# Altium PCB PCB1.PcbDoc
Units mil, origin at the board's own origin, x right, y up, seen from the top; angles counter-clockwise.
Board outline 3345 x 2755 mil, 2 copper layers (Top Layer, Bottom Layer); 16 components, 30 nets, 135 pads, 25 vias.
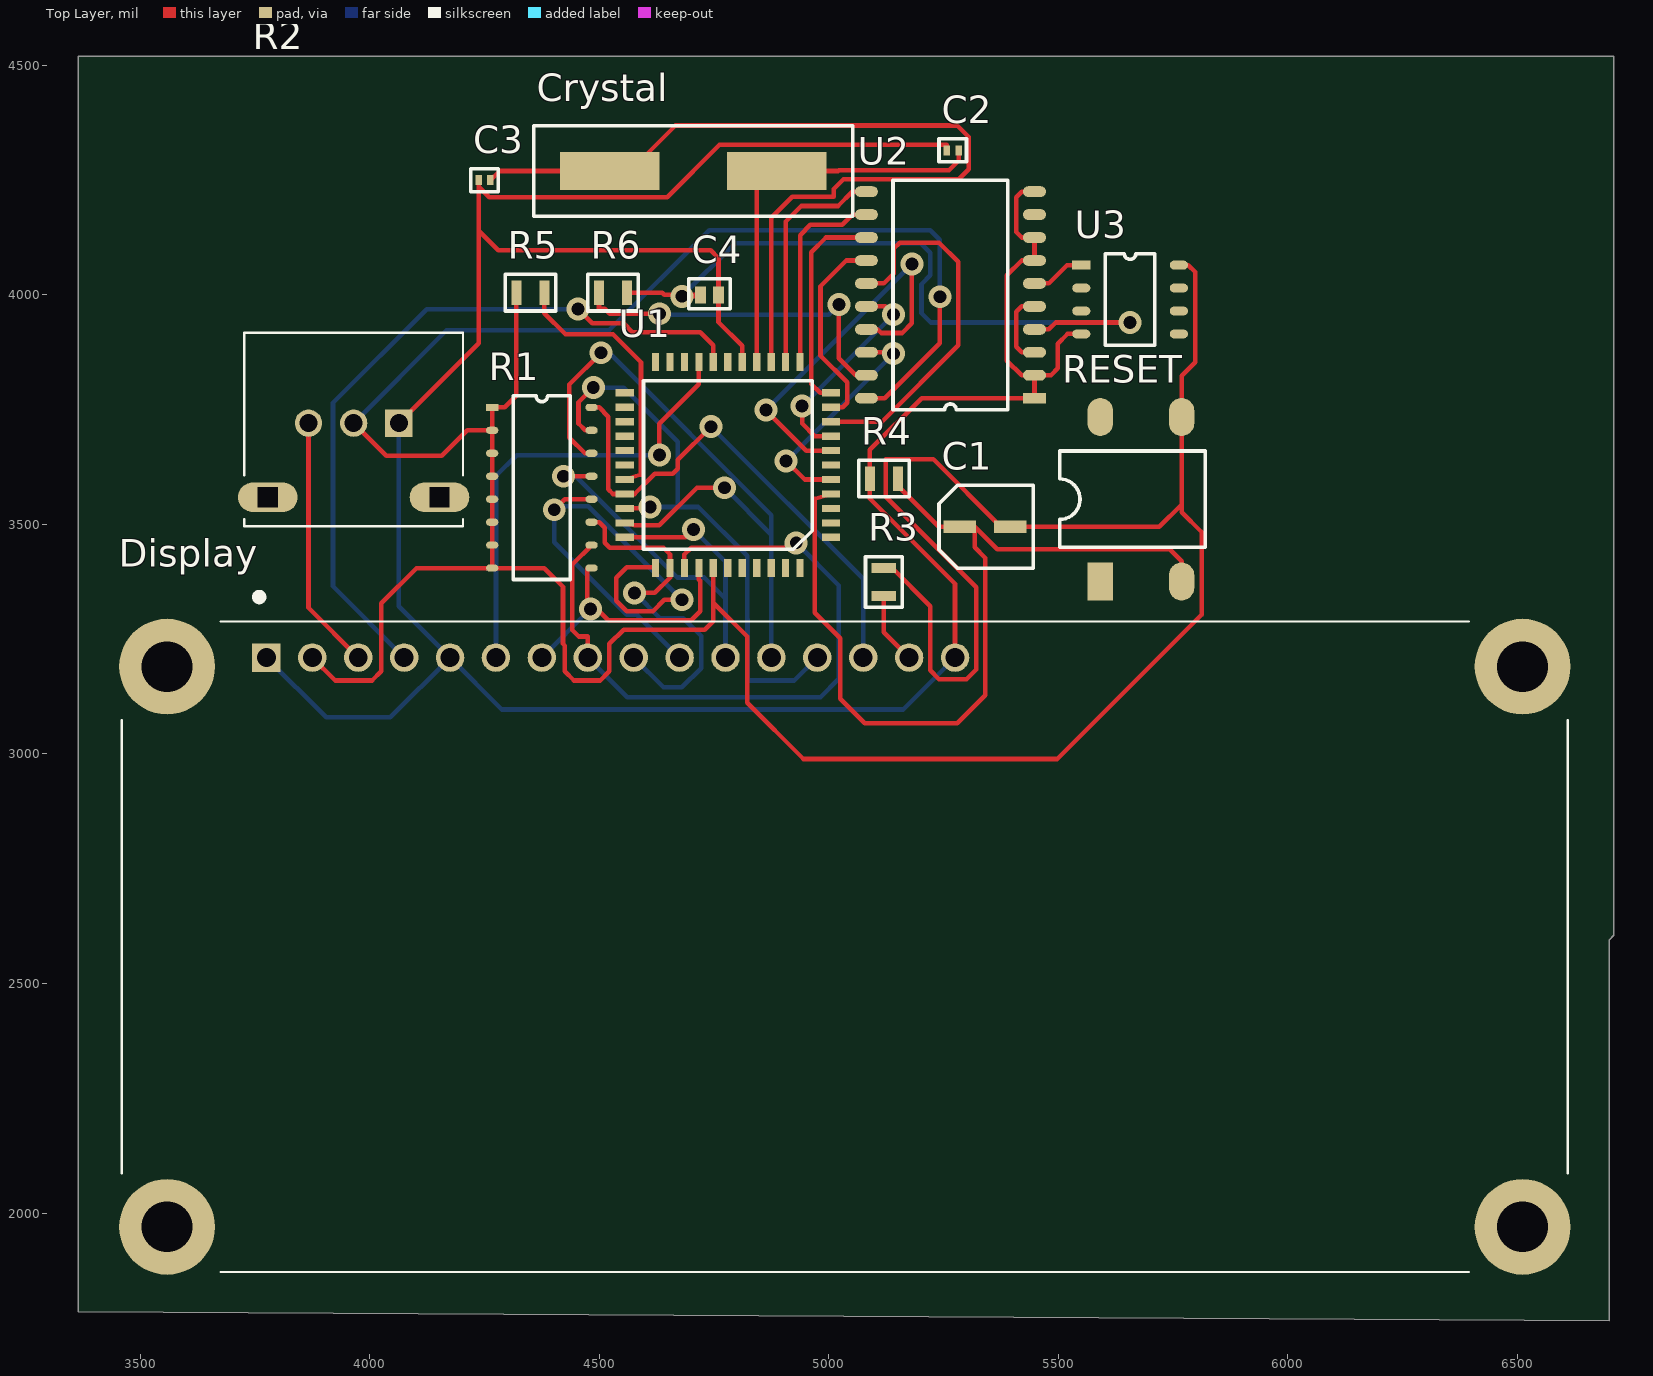
[diagram p0: Top Layer view]
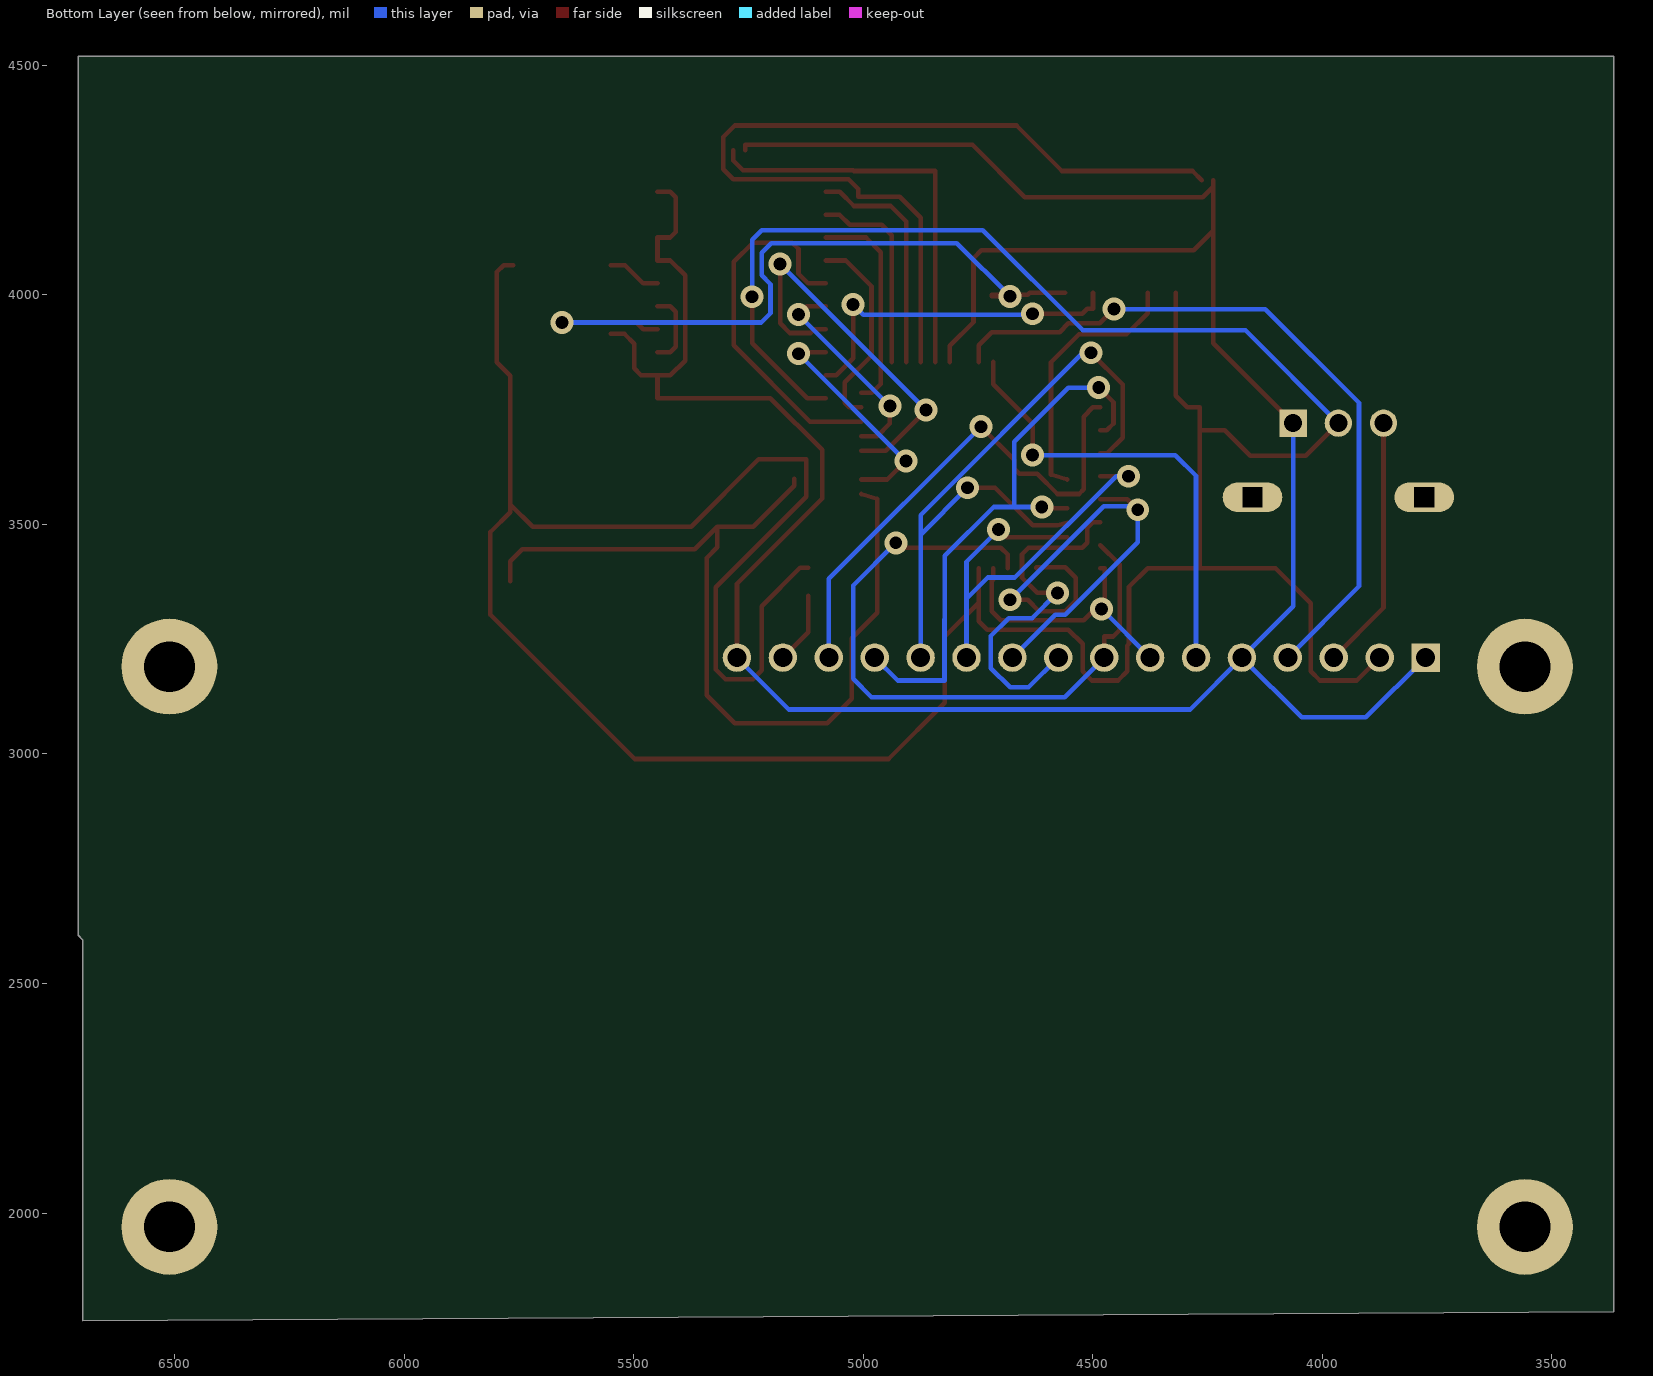
[diagram p1: Bottom Layer view, seen from below]
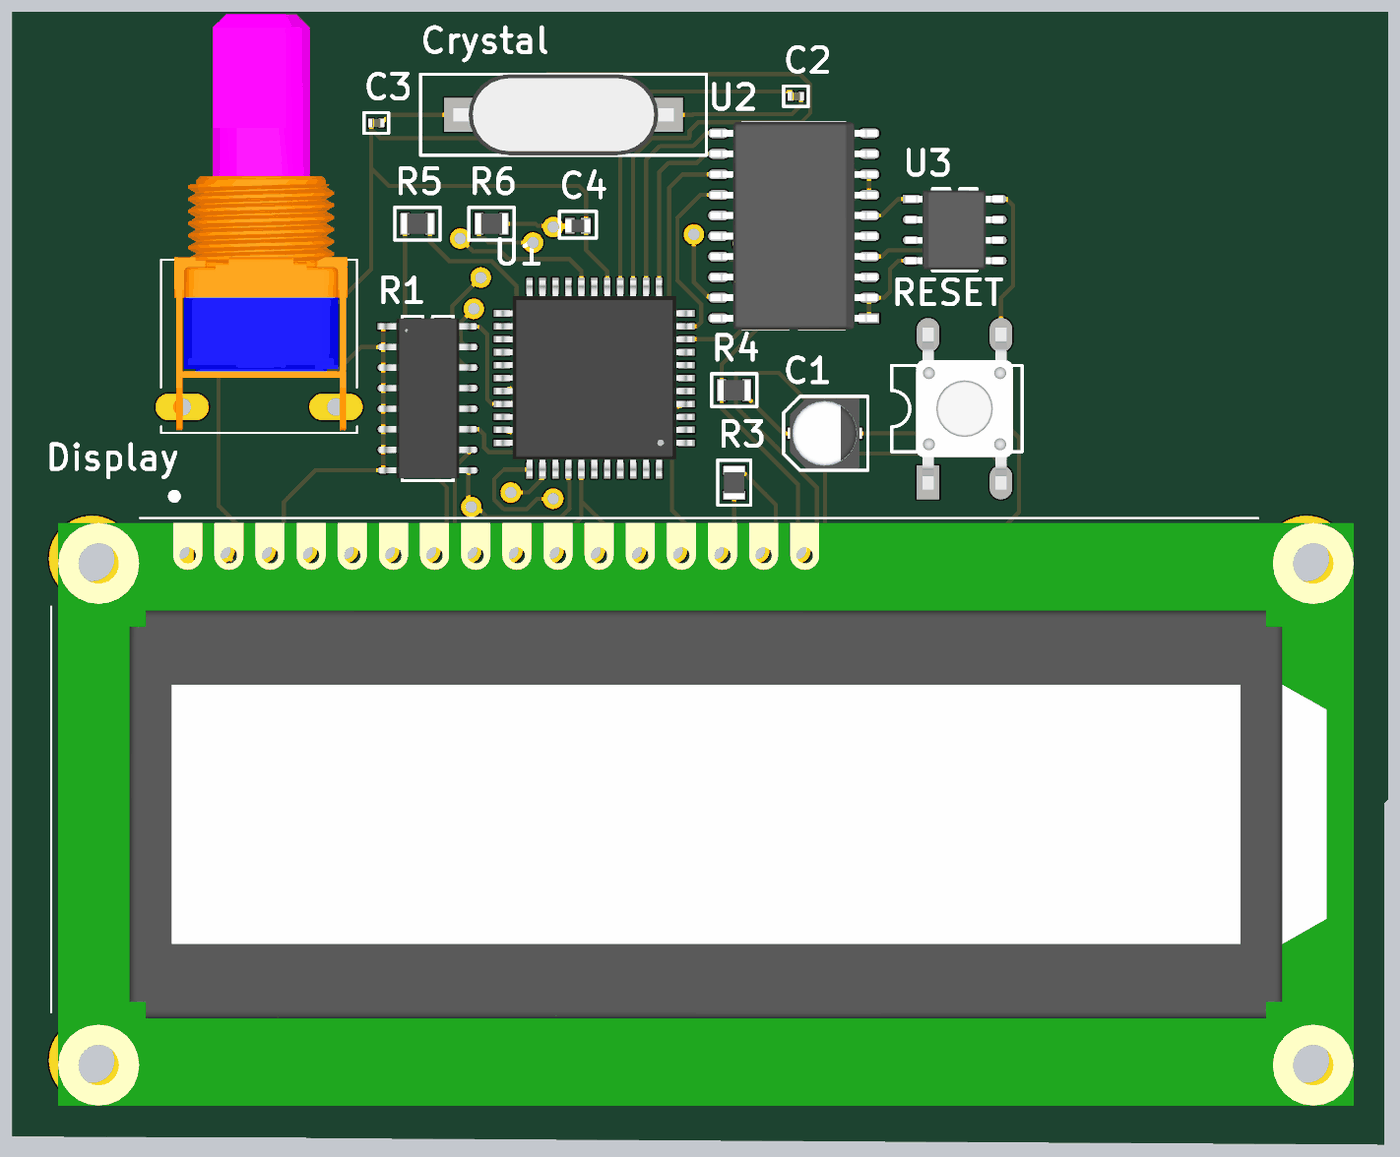
[diagram p2: 3D render of the assembled board from above, using the file's embedded part models]

## Layer stack, top to bottom
Top Solder: solder mask 0.4, Solder Resist, Dk 3.5
Top Layer: signal copper 1.4
Dielectric 1: dielectric 12.6, FR-4, Dk 4.8
Bottom Layer: signal copper 1.4
Bottom Solder: solder mask 0.4, Solder Resist, Dk 3.5

## Board outline
3365,1785 3365,4520 6710,4520 6710,2605 6700,2595 6700,2210 6700,1765

## Design rules (kind name [scope] priority, off if disabled: settings)
Clearance [All] p1: gap=10 ignorepadtopadclearanceinfootprint=FALSE except(0: Arc-Hole Track-Hole SMDPad-Hole THPad-Hole Via-Hole Fill-Hole Poly-Hole Region-Hole Text-Hole)
PolygonConnect [All] p1: connectstyle=Relief reliefconductorwidth=10 reliefentries=4 polygonreliefangle="90 Angle" airgapwidth=10
RoutingVias [All] p1: holewidth=28 width=50 viastyle="Through Hole" minholewidth=28 minwidth=50 maxholewidth=28 maxwidth=50
SolderMaskExpansion [All] p1: expansion=4 istentingtop=FALSE
Width [All] p1: maxlimit=10 minlimit=10 preferedwidth=10
30 further rules are at their usual default settings.

## Components (designator, comment, footprint, x,y, rotation, side; value= is the part's Value field where it differs from the comment)
C1 "10μF/16V Capacitor" "10µf/16v Capacitor" 5340,3495 r180 top
C2 "33pF capacitor" "33pF Capacitor" 5270,4315 r0 top
C3 "33pF capacitor" "33pF Capacitor" 4250,4250 r0 top
C4 "150pF Capacitor" "150pF Capacitor" 4740,4000 r0 top
Crystal "FC4SDCBMF11.0592-T1" "Crystal 11.0592MHz" 4705,4270 r0 top
Display "16X2 LCD Display" "16X2 LCD Display" 5056.5,2568.27 r0 top
R1 "1KΩ x 8 Resistor Pack" "1KO x 8 Resistor Pack" 4375,3580 r0 top
R2 "10k pot" "10k pot" 4000,4000 r90 top
R3 "330 Ohm resistor" "330O Resistor" 5120,3375 r90 top
R4 "10K Resistor" "10KO Resistor" 5120,3600 r0 top
R5 "10K Resistor" "10KO Resistor" 4350,4005 r0 top
R6 "10K Resistor" "10KO Resistor" 4530,4005 r0 top
RESET "TL3305AF260QG" Reset 5680,3555 r90 top
U1 "AT89C51RB2-SLSUM" "AT89C51 (8051 Microcontroller)" 4780,3629.41 r180 top
U2 "ADC0804" ADC0804 5265,4000 r180 top
U3 "LM35DMX/NOPB" LM35DMX 5550,4065 r0 top

## Footprints (in the part's own frame and the unit in brackets; to place one, negate y for a bottom-side part, rotate by r counter-clockwise, add the part's x,y. Pads: shape width x height; smd on the part's side, far side on the other; paste and mask are expansions set on the pad)
"1KO x 8 Resistor Pack" [mm]
  rect 0.68x0.4 smd: 1(-2.75,4.445)
  oval 0.68x0.4 smd: 2(-2.75,3.175) 3(-2.75,1.905) 4(-2.75,0.635) 5(-2.75,-0.635) 6(-2.75,-1.905) 7(-2.75,-3.175) 8(-2.75,-4.445) 9(2.75,-4.445) 10(2.75,-3.175) 11(2.75,-1.905) 12(2.75,-0.635) 13(2.75,0.635) 14(2.75,1.905) 15(2.75,3.175) 16(2.75,4.445)
  silkscreen extent -1.58,-5.08 1.58,5.08, body extent -2.98,-4.95 2.99,4.95, height 1.7
"10k pot" [mm]
  rect 1.508x1.508 hole 1: 1(-7.094,-1.611)
  round 1.508 hole 1: 2(-7.094,0.889) 3(-7.094,3.389)
  oval 1.65x3.3 hole 1.1 square: P1(-11.194,-3.861) P2(-11.194,5.639)
  silkscreen extent -12.79,-5.16 -2.09,6.94, body extent -12.64,-5.29 13.06,6.81, height 11.11
"10KO Resistor" [mm]
  rect 0.55x1.35 smd: 1(-0.775,0) 2(0.775,0)
  silkscreen extent -1.4,-1.02 1.4,1.02, body extent -1,-0.62 1,0.63, height 0.61
"10µf/16v Capacitor" [mm]
  rect 1.8x0.7 smd: 1(-1.4,0) 2(1.4,0)
  silkscreen extent -2.67,-2.29 2.54,2.29, body extent -2.3,-2.15 2.3,2.15, height 5.8
"16X2 LCD Display" [mm]
  rect 1.575x1.575 hole 1.05: 1(-32.55,16.3)
  round 1.575 hole 1.05: 2(-30.01,16.3) 3(-27.47,16.3) 4(-24.93,16.3) 5(-22.39,16.3) 6(-19.85,16.3) 7(-17.31,16.3) 8(-14.77,16.3) 9(-12.23,16.3) 10(-9.69,16.3) 11(-7.15,16.3) 12(-4.61,16.3) 13(-2.07,16.3) 14(0.47,16.3) 15(3.01,16.3) 16(5.55,16.3)
  round 5.3 hole 2.8: S1(-38.05,15.8) S2(-38.05,-15.2) S3(36.95,15.8) S4(36.95,-15.2)
  silkscreen extent -40.55,-17.7 39.45,19.85, body extent -40.13,-18 39.87,18, height 10.2
"33pF Capacitor" [mm]
  rect 0.35x0.55 smd: 1(-0.325,0) 2(0.325,0)
  silkscreen extent -0.76,-0.64 0.76,0.64, body extent -0.5,-0.25 0.5,0.25, height 0.55
"150pF Capacitor" [mm]
  rect 0.6x0.95 smd: 1(-0.5,0) 2(0.5,0)
  silkscreen extent -1.14,-0.76 1.14,0.89, body extent -0.8,-0.4 0.8,0.4, height 0.9
"330O Resistor" [mm]
  rect 0.55x1.35 smd: 1(-0.775,0) 2(0.775,0)
  silkscreen extent -1.4,-1.02 1.4,1.02, body extent -1,-0.63 1,0.62, height 0.61
ADC0804 [mm]
  rect 1.27x0.6 smd: 1(-4.65,5.715)
  oval 1.27x0.6 smd: 2(-4.65,4.445) 3(-4.65,3.175) 4(-4.65,1.905) 5(-4.65,0.635) 6(-4.65,-0.635) 7(-4.65,-1.905) 8(-4.65,-3.175) 9(-4.65,-4.445) 10(-4.65,-5.715) 11(4.65,-5.715) 12(4.65,-4.445) 13(4.65,-3.175) 14(4.65,-1.905) 15(4.65,-0.635) 16(4.65,0.635) 17(4.65,1.905) 18(4.65,3.175) 19(4.65,4.445) 20(4.65,5.715)
  silkscreen extent -3.18,-6.35 3.18,6.35, body extent -5.16,-6.4 5.16,6.4, height 1.75
"AT89C51 (8051 Microcontroller)" [mm]
  rect 1x0.4 smd: 1(-5.7,4) 2(-5.7,3.2) 3(-5.7,2.4) 4(-5.7,1.6) 5(-5.7,0.8) 6(-5.7,0) 7(-5.7,-0.8) 8(-5.7,-1.6) 9(-5.7,-2.4) 10(-5.7,-3.2) 11(-5.7,-4) 23(5.7,-4) 24(5.7,-3.2) 25(5.7,-2.4) 26(5.7,-1.6) 27(5.7,-0.8) 28(5.7,0) 29(5.7,0.8) 30(5.7,1.6) 31(5.7,2.4) 32(5.7,3.2) 33(5.7,4)
  rect 0.4x1 smd: 12(-4,-5.7) 13(-3.2,-5.7) 14(-2.4,-5.7) 15(-1.6,-5.7) 16(-0.8,-5.7) 17(0,-5.7) 18(0.8,-5.7) 19(1.6,-5.7) 20(2.4,-5.7) 21(3.2,-5.7) 22(4,-5.7) 34(4,5.7) 35(3.2,5.7) 36(2.4,5.7) 37(1.6,5.7) 38(0.8,5.7) 39(0,5.7) 40(-0.8,5.7) 41(-1.6,5.7) 42(-2.4,5.7) 43(-3.2,5.7) 44(-4,5.7)
  silkscreen extent -4.67,-4.67 4.67,4.67, body extent -6.04,-6.04 6.05,6.05, height 1.6
"Crystal 11.0592MHz" [mm]
  rect 5.5x2.1 smd: 1(-4.625,0) 2(4.625,0)
  silkscreen extent -8.82,-2.5 8.82,2.5, body extent -6.81,-2.5 6.81,2.5, height 4.55
LM35DMX [mm]
  rect 1x0.5 smd: 1(0,0)
  oval 1x0.5 smd: 2(0,-1.27) 3(0,-2.54) 4(0,-3.81) 5(5.4,-3.81) 6(5.4,-2.54) 7(5.4,-1.27) 8(5.4,0)
  silkscreen extent 1.34,-4.44 4.07,0.64, body extent -0.34,-4.36 5.68,0.55, height 1.63
Reset [mm]
  rect 2.1x1.4 smd: 1(-4.55,2.25)
  oval 2.1x1.4 smd: 2(-4.55,-2.25) 3(4.55,-2.25) 4(4.55,2.25)
  silkscreen extent -2.67,-3.56 2.67,4.5, body extent -5,-3 5,3, height 5

## Part data
C1: "Multilayer Ceramic Capacitors MLCC - SMD/SMT 10uF 16V X5R 10%", Capacitance=10uF, Case Code (Imperial)=0805, Case Code (Metric)=2012, Dielectric=X5R, Manufacturer=Yageo, Manufacturer Part Number=CC0805KKX5R7BB106, Max Operating Temperature=85°C, Min Operating Temperature=-55°C, Resistor Type=Ceramic, Supplier Part Number 1=311-1865-1-ND, Tolerance=10%, Voltage Rating=16V, Case/Package=0805, Category="Ceramic Capacitors", ComponentLink1Description=https://datasheet.ciiva.com/17434/upy-gphc-x5r-4v-to-50v-12-17434747.pdf?src-supplier=Avnet+Europe, ComponentLink1URL=https://datasheet.ciiva.com/17434/upy-gphc-x5r-4v-to-50v-12-17434747.pdf?src-supplier=Avnet+Europe, Construction=Flat, Depth=1.25mm, Halogen Free="Halogen Free", Height=1.25mm, Lead Free="Lead Free", Length=2mm, Mount="Surface Mount", Packaging="Tape and Reel", Pricing 1="1=0.40000, 10=0.27500, 50=0.19240, 100=0.16500, 500=0.12376, 1000=0.10450 (USD)", Radiation Hardening=No, RoHS=Yes, RoHS Compliant=Yes, Series=CC, Stock 1=725165, Supplier 1=Digi-Key, Termination=SMD/SMT, Thickness=0.057inch, Voltage Rating (DC)=16V, Weight=0.000194oz, Width=0.049inch
C2 C3: library part "smd 33pF capacitor", "Cap Ceramic 33pF 50V C0G 5% SMD 0402 125C Paper T/R", Capacitance=33pF, Case Code (Imperial)=0402, Case Code (Metric)=1005, Dielectric=C0G, Manufacturer=Samsung, Manufacturer Part Number=CL05C330JB5NNNC, Max Operating Temperature=125°C, Min Operating Temperature=-55°C, Package Quantity=1, Supplier Part Number 1=1276-1272-1-ND, Temperature Coefficient=300ppm/°C, Tolerance=5%, Voltage=50V, Case/Package=0402, Category="Ceramic Capacitors", ComponentLink1Description=https://datasheet.ciiva.com/15195/getdatasheetpartid-355282-15195687.pdf?src-supplier=Verical, ComponentLink1URL=https://datasheet.ciiva.com/15195/getdatasheetpartid-355282-15195687.pdf?src-supplier=Verical, ComponentLink2Description=https://datasheet.ciiva.com/29198/458594-da-01-en-vs-kondensator-0402-29198402.pdf?src-supplier=Conrad, ComponentLink2URL=https://datasheet.ciiva.com/29198/458594-da-01-en-vs-kondensator-0402-29198402.pdf?src-supplier=Conrad, Construction=Flat, Contact Plating=Tin, Depth=0.5mm, Height=0.5mm, Lead Free="Lead Free", Length=1mm, Material=Ceramic, Mount="Surface Mount", Packaging="Tape and Reel", Pricing 1="1=0.10000, 10=0.02500, 50=0.01360, 100=0.01120, 500=0.00796, 1000=0.00626, 2500=0.00569, 5000=0.00524 (USD)", Radiation Hardening=No, RoHS=Yes, RoHS Compliant=Yes, Series=CL, Stock 1=8625103, Supplier 1=Digi-Key, Thickness=0.022inch, Voltage Rating=50V, Voltage Rating (DC)=50V, Width=0.02inch
C4: "CAP CER 150PF 250V NPO 0603", Manufacturer=Yageo, Manufacturer Part Number=AC0603JRNPOYBN151, Supplier Part Number 1=311-3283-1-ND, ComponentLink1Description=http://www.yageo.com/NewPortal/_en/search/productDocs.jsp?YageoPartNumber=AC0603JRNPOYBN151&src-supplier=Digi-Key, ComponentLink1URL=http://www.yageo.com/NewPortal/_en/search/productDocs.jsp?YageoPartNumber=AC0603JRNPOYBN151&src-supplier=Digi-Key, Pricing 1="1=0.20000, 10=0.13300, 50=0.07980, 100=0.06740, 500=0.04610, 1000=0.04078 (USD)", RoHS=Yes, RoHS Compliant=Yes, Stock 1=20564, Supplier 1=Digi-Key
Crystal: "Crystal 11.0592MHz ±30ppm (Tol) ±50ppm (Stability) 20pF FUND 60Ohm 2-Pin HC-49/SDLF SMD T/R", Manufacturer="Fox Electronics", Supplier Part Number 1=631-1012-1-ND, ComponentLink1Description=http://www.foxonline.com/pdfs/C4SD.pdf?src-supplier=Digi-Key, ComponentLink1URL=http://www.foxonline.com/pdfs/C4SD.pdf?src-supplier=Digi-Key, Manufacturer Part Number=FC4SDCBMF11.0592-T1, Pricing 1="1=0.29000, 10=0.23900, 50=0.21500, 100=0.19110, 500=0.18154 (USD)", RoHS=Yes, Stock 1=29569, Supplier 1=Digi-Key
Display: "LCD Graphic Display Modules & Accessories FSTN (+) 80.0 x 36.0", Background Color=White, Manufacturer="Newhaven Display", Manufacturer Part Number=NHD-14432WG-BTFH-V#T, Max Operating Temperature=70°C, Min Operating Temperature=-20°C, Package Quantity=100, Supplier Part Number 1=NHD-14432WG-BTFH-V#T-ND, Backlight Type=LED, Category="LCD, OLED, Graphic Displays", ComponentLink1Description=https://datasheet.ciiva.com/5326/nhd-14432wg-btfh-vt-17058-5326579.pdf?src-supplier=Mouser, ComponentLink1URL=https://datasheet.ciiva.com/5326/nhd-14432wg-btfh-vt-17058-5326579.pdf?src-supplier=Mouser, ComponentLink2Description=https://datasheet.ciiva.com/15047/nhd-14432wg-btfh-vt-15047133.pdf?src-supplier=Digi-Key, ComponentLink2URL=https://datasheet.ciiva.com/15047/nhd-14432wg-btfh-vt-15047133.pdf?src-supplier=Digi-Key, Interface=Parallel, Packaging=Bulk, Pricing 1="1=18.55000, 5=17.43200, 10=16.56400 (USD)", Resolution (height)=32pixel, Resolution (width)=144pixel, RoHS=No, Stock 1=163, Supplier 1=Digi-Key
R1: "RES ARRAY 8 RES 1K OHM 16SOIC", Case/Package=SOIC, Manufacturer="Vishay Dale Thin Film", Manufacturer Part Number=NOMCT16031001AT1, Max Operating Temperature=125°C, Min Operating Temperature=-55°C, Number of Resistors=8, Package Quantity=1, Power Per Element=100mW, Resistance=1kR, Supplier Part Number 1=NOMCT16-1KACT-ND, Temperature Coefficient=25ppm/°C, Tolerance=0.1%, Voltage Rating=100V, Category="Resistor Arrays", Circuit Type=Isolated, ComponentLink1Description=https://datasheet.ciiva.com/2692/nomc-2692947.pdf?src-supplier=Digi-Key, ComponentLink1URL=https://datasheet.ciiva.com/2692/nomc-2692947.pdf?src-supplier=Digi-Key, ComponentLink2Description=https://datasheet.ciiva.com/2692/nomc-2692948.pdf?src-supplier=Digi-Key, ComponentLink2URL=https://datasheet.ciiva.com/2692/nomc-2692948.pdf?src-supplier=Digi-Key, ComponentLink3Description=https://datasheet.ciiva.com/2692/nomc-2692949.pdf?src-supplier=Digi-Key, ComponentLink3URL=https://datasheet.ciiva.com/2692/nomc-2692949.pdf?src-supplier=Digi-Key, Contact Plating=Tin,Matte, Height=0.063inch, Lead Free="Lead Free", Lead Pitch=1.27mm, Length=9.906mm, Mount="Surface Mount", Number of Pins=16, Number of Terminals/Pins=16, Packaging="Tape and Reel", Power Rating=100mW, Pricing 1="1=4.16000, 10=3.76000, 25=3.44000, 50=3.20000, 100=2.80000, 250=2.40000, 500=2.20000 (USD)", RoHS=Yes, RoHS Compliant=Yes, Series=NOMC, Stock 1=8459, Supplier 1=Digi-Key, Terminal Pitch=1.27mm, Termination=SMD/SMT, Width=0.154inch
R2: "Res POT 10K Ohm 20% 1/20W 1(Elec)/1(Mech)Turn 6mm (25.7 X 12.1 X 14.85mm) Pin Panel Mount/Bracket Mount Tray", Manufacturer="Alps Electric", Manufacturer Part Number=RK09L1120A2S, Max Operating Temperature=70°C, Min Operating Temperature=-10°C, Package Quantity=2000, Power Rating=50mW, Resistance=10kR, Resistor Type=Potentiometer, Supplier Part Number 1=688-RK09L1120A2S, Tolerance=20%, Category="Variable Resistors and Potentiometers", ComponentLink1Description=https://datasheet.ciiva.com/15764/rk09l-15764032.pdf?src-supplier=Onlinecomponents.com, ComponentLink1URL=https://datasheet.ciiva.com/15764/rk09l-15764032.pdf?src-supplier=Onlinecomponents.com, ComponentLink2Description=https://datasheet.ciiva.com/11830/0900766b80f4c570-11830918.pdf?src-supplier=RSComponents, ComponentLink2URL=https://datasheet.ciiva.com/11830/0900766b80f4c570-11830918.pdf?src-supplier=RSComponents, Depth=12.1mm, Hole Diameter=9mm, Lead Free="Lead Free", Length=25.7mm, Military Standard=Not, Mount="Panel,Brackets,Through Hole", Number of Turns=1, Packaging=Tray, Pricing 1="1=1.38000, 10=1.38000, 50=1.14000, 100=1.10000, 1000=0.99900, 10000=0.95000 (USD)", Radiation Hardening=No, RoHS=Yes, RoHS Compliant=Yes, Series=RK09L, Stock 1=3989, Supplier 1=Mouser, Termination=Pin, Type=Potentiometer
R3: library part "0805SMD 330resistor", "YAGEO   RC0805JR-07330RL   THICK FILM RESISTOR, 330 OHM, 125mW, 5%, FULL REEL", Case Code (Imperial)=0805, Case Code (Metric)=2012, Manufacturer=Yageo, Manufacturer Part Number=RL0805FR-7W0R33L, Max Operating Temperature=125°C, Max Power Dissipation=250mW, Min Operating Temperature=-55°C, Package Quantity=5000, Power Rating=125mW, Resistance=330mR, Resistance Tolerance=1%, Resistor Type="Thick Film", Supplier Part Number 1=311-.33LUCT-ND, Temperature Coefficient=600ppm/°C, Voltage Rating=150V, Case/Package=0805, Category="Chip SMD Resistors", ComponentLink1Description=https://datasheet.ciiva.com/14972/rl20high20power20series-14972688.pdf?src-supplier=Digi-Key, ComponentLink1URL=https://datasheet.ciiva.com/14972/rl20high20power20series-14972688.pdf?src-supplier=Digi-Key, ComponentLink2Description=https://datasheet.ciiva.com/7942/1693483-7942062.pdf?src-supplier=Element14, ComponentLink2URL=https://datasheet.ciiva.com/7942/1693483-7942062.pdf?src-supplier=Element14, ComponentLink3Description=https://datasheet.ciiva.com/7942/1693483-7942063.pdf?src-supplier=Element14, ComponentLink3URL=https://datasheet.ciiva.com/7942/1693483-7942063.pdf?src-supplier=Element14, ComponentLink4Description=https://datasheet.ciiva.com/17008/rc0805-17008395.pdf?src-supplier=Future+Electronics, ComponentLink4URL=https://datasheet.ciiva.com/17008/rc0805-17008395.pdf?src-supplier=Future+Electronics, ComponentLink5Description=https://datasheet.ciiva.com/46395/444164-46395119.pdf?src-supplier=Element14, ComponentLink5URL=https://datasheet.ciiva.com/46395/444164-46395119.pdf?src-supplier=Element14, ComponentLink6Description=https://datasheet.ciiva.com/7941/442941-7941941.pdf?src-supplier=Element14, ComponentLink6URL=https://datasheet.ciiva.com/7941/442941-7941941.pdf?src-supplier=Element14, ComponentLink7Description=https://datasheet.ciiva.com/7941/442941-7941942.pdf?src-supplier=Element14, ComponentLink7URL=https://datasheet.ciiva.com/7941/442941-7941942.pdf?src-supplier=Element14, ComponentLink8Description=https://datasheet.ciiva.com/12555/rc0805-257173-12555078.pdf?src-supplier=Mouser, ComponentLink8URL=https://datasheet.ciiva.com/12555/rc0805-257173-12555078.pdf?src-supplier=Mouser, Construction=Rectangular, Contact Plating=Tin,Matte,Lead, Depth=1.25mm, Features="Moisture Resistant,Automotive AEC-Q200", Height=0.5mm, Lead Free="Lead Free", Length=2mm, Military Standard=Not, Number of Terminations=2, Packaging="Tape and Reel", Pricing 1="1=0.42000, 10=0.32300, 100=0.13570, 1000=0.07490, 2500=0.07022 (USD)", Pricing 2="1=0.10000, 10=0.03100, 100=0.01260, 1000=0.00567, 2500=0.00492 (USD)", Radiation Hardening=No, REACH SVHC=Unknown, RoHS=Yes, RoHS Compliant=Yes, Series=RL, Size Code=0805, Stock 1=7620, Stock 2=1073130, Supplier 1=Digi-Key, Supplier 2=Digi-Key, Supplier Part Number 2=311-330ARCT-ND, Technology="THICK FILM", Termination=SMD/SMT, Tolerance=1%, Weight=0.000194oz, Width=1.25mm
R4 R5 R6: library part "0805 SMD 10k resistor", Supplier Part Number 1=YAG1763CT-ND, Supplier 1=Digi-Key
RESET: "Tactile Switches 6mm SMT Gull Wing 5mm Act Height", Contact Resistance=100mR, Current Rating=50mA, Insulation Resistance=100MR, Manufacturer=E-Switch, Max Operating Temperature=70°C, Max Voltage Rating (DC)=50V, Min Operating Temperature=-20°C, Operating Force=260gf, Package Quantity=1000, Supplier Part Number 1=EG5353CT-ND, Voltage Rating (DC)=12V, Actuator Length=1.4mm, Actuator Material=Nylon,Polyamide, Actuator Type=Standard, Category="Tactile Switches", ComponentLink1Description=http://www.farnell.com/datasheets/2554191.pdf?src-supplier=Farnell, ComponentLink1URL=http://www.farnell.com/datasheets/2554191.pdf?src-supplier=Farnell, ComponentLink2Description=http://spec_sheets.e-switch.com/specs/P010471.pdf?src-supplier=Mouser, ComponentLink2URL=http://spec_sheets.e-switch.com/specs/P010471.pdf?src-supplier=Mouser, ComponentLink3Description=http://www.farnell.com/datasheets/2554191.pdf?src-supplier=Newark, ComponentLink3URL=http://www.farnell.com/datasheets/2554191.pdf?src-supplier=Newark, ComponentLink4Description=http://www.farnell.com/datasheets/2554191.pdf?src-supplier=Element14, ComponentLink4URL=http://www.farnell.com/datasheets/2554191.pdf?src-supplier=Element14, ComponentLink5Description=http://spec_sheets.e-switch.com/specs/P010471.pdf?src-supplier=Digi-Key, ComponentLink5URL=http://spec_sheets.e-switch.com/specs/P010471.pdf?src-supplier=Digi-Key, ComponentLink6Description=http://spec_sheets.e-switch.com/specs/P010471.pdf?src-supplier=NAC+Semi, ComponentLink6URL=http://spec_sheets.e-switch.com/specs/P010471.pdf?src-supplier=NAC+Semi, ComponentLink7Description=https://datasheet.ciiva.com/2900/p010516d-2900775.pdf?src-supplier=Digi-Key, ComponentLink7URL=https://datasheet.ciiva.com/2900/p010516d-2900775.pdf?src-supplier=Digi-Key, ComponentLink8Description=https://datasheet.ciiva.com/7637/tl3301-7637656.pdf?src-supplier=Element14, ComponentLink8URL=https://datasheet.ciiva.com/7637/tl3301-7637656.pdf?src-supplier=Element14, ComponentLink9Description=https://datasheet.ciiva.com/2900/tl3301-2900776.pdf?src-supplier=Digi-Key, ComponentLink9URL=https://datasheet.ciiva.com/2900/tl3301-2900776.pdf?src-supplier=Digi-Key, Contact Material=Silver, Contact Plating=Silver, Electrical Life=100000Cycles, Illumination Type=Non-Illuminated, Lead Free="Lead Free", Manufacturer Part Number=TL3305AF260QG, Mechanical Life=200000Cycles, Mount="Surface Mount", Orientation=Straight, Packaging="Tape and Reel", Pricing 1="1=0.18000, 10=0.17700, 25=0.16760, 100=0.15250, 250=0.14336, 500=0.13116, 1000=0.10980 (USD)", Pricing 2="1=0.36000, 10=0.34800, 25=0.32760, 100=0.28440, 250=0.25800, 500=0.24000 (USD)", REACH SVHC="No SVHC", RoHS=No, RoHS Compliant=Yes, Series=TL3301, Stock 1=78497, Stock 2=51540, Supplier 1=Digi-Key, Supplier 2=Digi-Key, Supplier Part Number 2=EG2526CT-ND, Switch Function=Off-Mom, Switch Travel=0.2mm, Termination="Gull Wing", Throw Configuration=SPST, Voltage Rating=50V
U1: "MCU 8-bit AT89 80C51 CISC 32KB Flash 3.3V/5V 44-Pin VQFP Tray", Case/Package=PLCC, Frequency=60MHz, Manufacturer="Microchip / Atmel", Max Operating Temperature=85°C, Max Power Dissipation=1W, Max Supply Voltage=5.5V, Min Operating Temperature=-40°C, Min Supply Voltage=2.7V, Package Quantity=972, Supplier Part Number 1=AT89C51RB2-SLSUM-ND, Access Time=60us, Address Bus Width=8b, Category=Microcontrollers, ComponentLink1Description=https://datasheet.ciiva.com/15122/getdatasheetpartid-81444-15122117.pdf?src-supplier=Verical, ComponentLink1URL=https://datasheet.ciiva.com/15122/getdatasheetpartid-81444-15122117.pdf?src-supplier=Verical, ComponentLink2Description=https://datasheet.ciiva.com/26820/at89c51rb2-slsum-26820400.pdf?src-supplier=IIIC, ComponentLink2URL=https://datasheet.ciiva.com/26820/at89c51rb2-slsum-26820400.pdf?src-supplier=IIIC, ComponentLink3Description=https://datasheet.ciiva.com/24153/doc4180-24153718.pdf?src-supplier=Future+Electronics, ComponentLink3URL=https://datasheet.ciiva.com/24153/doc4180-24153718.pdf?src-supplier=Future+Electronics, ComponentLink4Description=https://datasheet.ciiva.com/3203/doc4180-3203035.pdf?src-supplier=Avnet, ComponentLink4URL=https://datasheet.ciiva.com/3203/doc4180-3203035.pdf?src-supplier=Avnet, ComponentLink5Description=https://datasheet.ciiva.com/22640/1626853-22640219.pdf?src-supplier=Element14, ComponentLink5URL=https://datasheet.ciiva.com/22640/1626853-22640219.pdf?src-supplier=Element14, ComponentLink6Description=https://datasheet.ciiva.com/22640/1626853-22640224.pdf?src-supplier=Element14, ComponentLink6URL=https://datasheet.ciiva.com/22640/1626853-22640224.pdf?src-supplier=Element14, ComponentLink7Description=https://datasheet.ciiva.com/26820/at89c51rc2-rltum-26820404.pdf?src-supplier=IIIC, ComponentLink7URL=https://datasheet.ciiva.com/26820/at89c51rc2-rltum-26820404.pdf?src-supplier=IIIC, ComponentLink8Description=https://datasheet.ciiva.com/26207/doc4180-26207493.pdf?src-supplier=Avnet+Europe, ComponentLink8URL=https://datasheet.ciiva.com/26207/doc4180-26207493.pdf?src-supplier=Avnet+Europe, ComponentLink9Description=https://datasheet.ciiva.com/9233/doc4180-9233990.pdf?src-supplier=Avnet, ComponentLink9URL=https://datasheet.ciiva.com/9233/doc4180-9233990.pdf?src-supplier=Avnet, ComponentLink10Description=https://datasheet.ciiva.com/6656/doc4180-6656425.pdf?src-supplier=Digi-Key, ComponentLink10URL=https://datasheet.ciiva.com/6656/doc4180-6656425.pdf?src-supplier=Digi-Key, Contact Plating=Tin,Matte, Core Architecture=8051, Data Bus Width=8b, Interface=SPI,UART,USART, Lead Free="Lead Free", Manufacturer Part Number=AT89C51RB2-SLSUM, Max Frequency=60MHz, Memory Size=16KB, Memory Type=FLASH, Mount="Surface Mount", Number of I/Os=32, Number of Pins=44, Number of Programmable I/O=32, Number of Timers/Counters=3, Oscillator Type=External, Packaging=Rail/Tube, Peripherals=POR,PWM,WDT, Pricing 1="1=5.21000, 25=4.78000, 100=4.33000 (USD)", Pricing 2="1=5.95000, 25=5.46000, 100=4.95000 (USD)", Radiation Hardening=No, RAM Size=1.25KB, REACH SVHC="No SVHC", RoHS=Yes, RoHS Compliant=Yes, Series=89C, Stock 1=4189, Stock 2=1379, Supplier 1=Digi-Key, Watchdog Timer=Yes
U2: "TEXAS INSTRUMENTS         ADC0804LCWM/NOPB            ANALOG TO DIGITAL CONVERTER ADC, 8 BIT, 9.708kSPS, SOIC-20", Case/Package=SOIC, Manufacturer="TI National Semiconductor", Manufacturer Part Number=ADC0804LCWM/NOPB, Max Operating Temperature=70°C, Max Power Dissipation=875mW, Max Supply Voltage=6.3V, Min Operating Temperature=0°C, Min Supply Voltage=4.5V, Operating Supply Voltage=5V, Package Quantity=36, Power Consumption=5.5mW, Supplier Part Number 1=ADC0804LCWM/NOPB-ND, Category="Analog to Digital Converters (ADCs)", ComponentLink1Description=https://datasheet.ciiva.com/27051/1251291-27051770.pdf?src-supplier=Jameco, ComponentLink1URL=https://datasheet.ciiva.com/27051/1251291-27051770.pdf?src-supplier=Jameco, ComponentLink2Description=https://datasheet.ciiva.com/25993/adc0804-n-25993733.pdf?src-supplier=Avnet+Europe, ComponentLink2URL=https://datasheet.ciiva.com/25993/adc0804-n-25993733.pdf?src-supplier=Avnet+Europe, ComponentLink3Description=https://datasheet.ciiva.com/1275/adc0804-n-1275641.pdf?src-supplier=Digi-Key, ComponentLink3URL=https://datasheet.ciiva.com/1275/adc0804-n-1275641.pdf?src-supplier=Digi-Key, ComponentLink4Description=https://datasheet.ciiva.com/3037/adc0804-n-3037867.pdf?src-supplier=Avnet, ComponentLink4URL=https://datasheet.ciiva.com/3037/adc0804-n-3037867.pdf?src-supplier=Avnet, ComponentLink5Description=https://datasheet.ciiva.com/7988/1837602-7988877.pdf?src-supplier=Element14, ComponentLink5URL=https://datasheet.ciiva.com/7988/1837602-7988877.pdf?src-supplier=Element14, ComponentLink6Description=https://datasheet.ciiva.com/48707/001047394-da-01-en-ic-adc-comp-adc0804lcwm-nopb-soic-20-tid-48707530.pdf?src-supplier=Conrad, ComponentLink6URL=https://datasheet.ciiva.com/48707/001047394-da-01-en-ic-adc-comp-adc0804lcwm-nopb-soic-20-tid-48707530.pdf?src-supplier=Conrad, Conversion Rate=10KS/s, Height=2.34mm, Interface=Parallel, Lead Free="Lead Free", Length=12.8mm, Mount="Surface Mount", Number of A/D Converters=1, Number of Analog Inputs=1, Number of Bits=8, Number of Channels=1, Number of Converters=1, Number of Elements=1, Number of Inputs=1, Number of Pins=20, Packaging=Rail/Tube, Polarity=Unipolar, Power Dissipation=875mW, Pricing 1="1=4.74000, 10=4.25800, 25=4.02600, 100=3.31020, 250=2.97020, 500=2.86284, 1000=2.37974, 2500=2.29028, 5000=2.27880 (USD)", Radiation Hardening=No, REACH SVHC="No SVHC", Resolution=8b, RoHS=Yes, Sampling Rate=10KS/s, Stock 1=3151, Supplier 1=Digi-Key, Supply Type=Single, Width=7.47mm
U3: "SENSOR ANALOG 0C-100C 8SOIC", Case/Package=SOIC, Manufacturer="TI National Semiconductor", Max Operating Temperature=110°C, Max Supply Voltage=30V, Min Operating Temperature=-40°C, Min Supply Voltage=4V, Operating Supply Current=91.5uA, Output Current=10mA, Package Quantity=2500, Quiescent Current=56uA, Supplier Part Number 1=LM35DMX/NOPBCT-ND, Category="Temperature and Humidity Sensors", ComponentLink1Description=https://datasheet.ciiva.com/15098/getdatasheetpartid-663045-15098167.pdf?src-supplier=Verical, ComponentLink1URL=https://datasheet.ciiva.com/15098/getdatasheetpartid-663045-15098167.pdf?src-supplier=Verical, ComponentLink2Description=https://datasheet.ciiva.com/46417/1837589-46417013.pdf?src-supplier=Element14, ComponentLink2URL=https://datasheet.ciiva.com/46417/1837589-46417013.pdf?src-supplier=Element14, ComponentLink3Description=https://datasheet.ciiva.com/3277/lm35-3277911.pdf?src-supplier=Avnet, ComponentLink3URL=https://datasheet.ciiva.com/3277/lm35-3277911.pdf?src-supplier=Avnet, ComponentLink4Description=https://datasheet.ciiva.com/6476/lm35-6476191.pdf?src-supplier=Digi-Key, ComponentLink4URL=https://datasheet.ciiva.com/6476/lm35-6476191.pdf?src-supplier=Digi-Key, Contact Plating=Tin, Interface=Analog, Lead Free="Lead Free", Manufacturer Part Number=LM35DMX/NOPB, Max Supply Voltage (DC)=30V, Min Supply Voltage (DC)=4V, Mount="Surface Mount", Number of Pins=8, Output Type="Analog Voltage,Analog", Packaging="Tape and Reel", Pricing 1="1=1.99000, 5=1.88000, 10=1.61100, 25=1.28880, 50=1.18140, 100=1.07400, 500=0.93976, 1000=0.83235 (USD)", Radiation Hardening=No, REACH SVHC="No SVHC", RoHS=Yes, RoHS Compliant=Yes, Series=LM35, Stock 1=11817, Supplier 1=Digi-Key

## Via types
v1: diameter 50, hole 28, Top Layer to Bottom Layer, 25 vias

## Nets (pads, with @x,y where several pads share a name; then routed paths per layer and width w, separated by ;. In a path a pad name is that pad's centre, name@x,y a point inside that pad or via, vN(x,y) a via of type N, cw(c..) or ccw(c..) an arc to the next point about the centre after c; other vN are vias at no path point)
+5: C1.1 Display.2 R1.1 R1.2 R1.3 R1.4 R1.5 R1.6 R1.7 R1.8 R2.2 R3.2 R5.1 RESET.3 U1.38 U2.20 U3.8 | length 8275.7
  Top Layer w10: Display.2 3925,3160 4005,3160 4025,3180 4025,3328 4102,3405 R1.8 ; R2.2 4036.24,3649.47 4157.16,3649.47 4212.7,3705 R1.2 ; R5.1 4319.49,3780 4294.49,3755 R1.1 R1.2 ; U1.38 4748.5,3329.5 ; U2.20 5122,3775 5242,3895 v1(5242,3996) ; R3.2 5137.6,3405.51 5221,3322.11 5221,3182 5240,3163 5300,3163 5321,3184 5321,3363 5124,3560 5124,3642 5228,3642 5375,3495 C1.1 5720,3495 5768.58,3543.58 ; U3.8 5783,4065 5798,4050 5798,3853.42 5768.58,3824 RESET.3 5768.58,3543.58 ; R1.8 4380,3405 4421,3364 4421,3240 4425,3236 4425,3180 4445,3160 4502,3160 4522,3180 4522,3240 4553,3271 4730,3271 4748.5,3289.5 4748.5,3329.5 ; R1.8 R1.7 R1.6 R1.5 R1.4 R1.3 R1.2 ; 4748.5,3329.5 4822,3256 4822,3112 4945,2989 5498,2989 5812,3303 5812,3483.58 5768.58,3527 5768.58,3543.58
  Bottom Layer w10: R2.2 4167.29,3923 4521.34,3923 4739.34,4141 5221,4141 5242,4120 v1(5242,3996)
GND: C2.1 C3.1 C4.2 Display.1 Display.5 Display.16 R2.1 R4.1 U1.16 U2.1 U2.2 U2.7 U2.8 U2.10 U3.4 | length 6447.1
  Top Layer w10: R2.1 4237.2,3894.49 4237.2,4139.8 ; C3.1 4237.2,4235.8 ; U1.16 4811.5,3889 4759.69,3940.81 C4.2 4759.69,4080 4742.69,4097 4280,4097 4237.2,4139.8 ; C2.1 5257.2,4327 4762,4327 4648,4213 4260,4213 4237.2,4235.8 ; Display.16 5275,3371 5089.49,3556.51 R4.1 5089.49,3662.34 5202.15,3775 U2.1 U2.2 ; U2.10 5420,4225 5408,4213 5408,4137 5420,4125 U2.8 U2.7 5420,4075 5388,4043 5388,3857 5420,3825 U2.2 ; U3.4 5520,3915 5499,3894 5499,3840 5484,3825 U2.2 ; 4237.2,4139.8 4237.2,4235.8
  Bottom Layer w10: Display.1 3905,3080 4045,3080 Display.5 ; R2.1 4063.43,3321.57 Display.5 ; Display.16 5162,3097 4288,3097 Display.5
NetC1_2: C1.2 R4.2 RESET.2 U1.4 | length 1981.6
  Top Layer w10: U1.4 4969,3555.42 4969,3308 5025,3252 5025,3120 5078,3067 5280,3067 5341,3128 5341,3427 5318,3450 C1.2@5318,3495 ; R4.2 5150.51,3584 5239.51,3495 C1.2 C1.2@5318,3495 ; RESET.2 5768.58,3420 5742.58,3446 5367,3446 C1.2@5318,3495
NetC2_2: C2.2 Crystal.2 U1.15 | length 887.6
  Top Layer w10: U1.15 4842.99,4270 Crystal.2 5020.12,4270 5021.93,4271.81 5261.81,4271.81 5282.8,4292.8 C2.2
NetC3_2: C3.2 Crystal.1 U1.14 | length 1970.6
  Top Layer w10: C3.2 4282.8,4270 Crystal.1 4567,4270 4666,4369 5280,4369 5305,4344 5305,4274 5282.81,4251.81 5032,4251.81 5011,4230.81 5011,4213.66 4920,4213.66 4874.49,4168.15 U1.14
NetC4_1: C4.1 R6.2 U2.4 | length 1619.2
  Top Layer w10: R6.2 4637,4005 4642,4000 C4.1 4720.32,3997 v1(4680,3997) ; U2.4 5479,3925 5494,3940 v1(5656,3940)
  Bottom Layer w10: v1(4680,3997) 4796,4113 5200,4113 5221,4092 5221,4042.5 5202,4023.5 5202,3960 5222,3940 v1(5656,3940)
NetDisplay_3: Display.3 R2.3 | length 555.6
  Top Layer w10: R2.3 3866.57,3318.43 Display.3
NetDisplay_4: Display.4 U1.18 | length 1601.4
  Top Layer w10: v1(4454,3969) 4485,3938 4553,3938 4572,3919 4720,3919 4748.5,3890.5 U1.18
  Bottom Layer w10: Display.4 3920,3365 3920,3765 4124,3969 v1(4454,3969)
NetDisplay_6: Display.6 U1.19 | length 1009.1
  Top Layer w10: v1(4631,3651) 4631,3718.99 4717.01,3805 U1.19
  Bottom Layer w10: Display.6 4275,3606 4320,3651 v1(4631,3651)
NetDisplay_7: Display.7 R1.9 U1.37 | length 617.9
  Top Layer w10: v1(4481,3316) v1@4474,3337 ; R1.9 4474,3405 v1@4474,3337 ; U1.37 4717.01,3380 4720,3377.01 4720,3311 4700,3291 4520,3291 v1@4474,3337
  Bottom Layer w10: Display.7 v1(4481,3316)
NetDisplay_8: Display.8 R1.10 U1.36 | length 1505.6
  Top Layer w10: Display.8 4475,3256 4455,3256 4441,3270 4441,3412.73 R1.10 ; U1.36 4685.51,3434.51 4700,3449 4918,3449 v1(4929,3460)
  Bottom Layer w10: Display.8 4561,3124 4982,3124 5022,3164 5022,3367 v1(4929,3460)
NetDisplay_9: Display.9 R1.11 U1.35 | length 805.8
  Top Layer w10: R1.11 4500,3505 4512,3493 4512,3460 4523,3449 4640,3449 4654.02,3434.98 U1.35 4654.02,3384.33 4620.69,3351 v1(4577,3351)
  Bottom Layer w10: Display.9 4640,3145 4680,3145 4722,3187 4722,3257 4683.21,3295.79 4632.21,3295.79 v1(4577,3351)
NetDisplay_10: Display.10 R1.12 U1.34 | length 1214.2
  Top Layer w10: v1(4402,3532) 4425,3555 R1.12 ; U1.34 4622.52,3407 4560,3407 4537,3384 4537,3334 4560,3311 4617,3311 4642,3336 v1(4680,3336)
  Bottom Layer w10: Display.10 4581.49,3303.51 4560,3303.51 4402,3461.51 v1(4402,3532) 4410,3540 4476,3540 v1(4680,3336)
NetDisplay_11: Display.11 R1.13 U1.33 | length 989.4
  Top Layer w10: v1(4422,3605) R1.13 ; U1.33 4688,3471.93 v1(4705.07,3489)
  Bottom Layer w10: v1(4422,3605) 4449,3605 4669.61,3384.39 4728.6,3384.39 4775,3337.99 ; v1(4705.07,3489) 4775,3419.07 4775,3337.99 ; Display.11 4775,3337.99
NetDisplay_12: Display.12 R1.14 U1.32 | length 1500.2
  Top Layer w10: R1.14 4469,3655 4434.88,3689.12 4434.88,3804.88 v1(4504,3874) ; U1.32 4576.43,3498 4631.03,3498 4713,3579.97 v1(4773.03,3579.97)
  Bottom Layer w10: v1(4504,3874) 4521.5,3874 4875,3520.5 4875,3478 ; v1(4773.03,3579.97) 4875,3478 ; Display.12 4875,3478
NetDisplay_13: Display.13 R1.15 U1.31 | length 1257.1
  Top Layer w10: R1.15 4469.88,3705 4454.88,3720 4454.88,3765.88 v1(4487,3798) ; U1.31 4607.92,3534.92 v1(4611,3538)
  Bottom Layer w10: v1(4487,3798) 4553,3798 4671,3680 4671,3538 ; v1(4611,3538) 4671,3538 ; Display.13 4925,3160 4823,3160 4822,3432 4716,3538 4671,3538
NetDisplay_14: Display.14 R1.16 U1.30 | length 1143.4
  Top Layer w10: R1.16 4500,3755 4520,3735 4520,3576.42 4530,3566.42 U1.30 4576.79,3566.42 4620.93,3610.56 4660,3610.56 4671,3621.56 4671,3640.63 v1(4743.37,3713)
  Bottom Layer w10: v1(4743.37,3713) 5075,3381.37 Display.14
NetDisplay_15: Display.15 R3.1 | length 157.3
  Top Layer w10: R3.1 5120,3265 Display.15
NetR5_2: R5.2 U1.29 | length 581
  Top Layer w10: R5.2 4380.51,3960 4426.51,3914 4530,3914 4591,3853 4591,3608.91 U1.29
NetR6_1: R6.1 U2.19 | length 764.8
  Top Layer w10: R6.1 4499.49,3969.51 4512.23,3969.51 4522.74,3959 v1(4631,3959) ; v1(5022,3979) 5022,3862.1 5059.1,3825 U2.19
  Bottom Layer w10: v1(4631,3959) 4637.98,3959 4640.36,3956.62 4999.62,3956.62 v1(5022,3979)
NetU1_5: U1.5 U2.18 | length 505.1
  Top Layer w10: v1(4907.09,3638.09) 4947.26,3597.91 U1.5 ; U2.18 5138,3875 v1(5141,3872)
  Bottom Layer w10: v1(4907.09,3638.09) v1(5141,3872)
NetU1_7: U1.7 U2.17 | length 867.7
  Top Layer w10: v1(4863,3749) 4951.09,3660.91 U1.7 ; U2.17 5106,3925 5114,3917 5160,3917 5181,3938 v1(5181,4067)
  Bottom Layer w10: v1(4863,3749) v1(5181,4067)
NetU1_8: U1.8 U2.16 | length 459.8
  Top Layer w10: v1(4942,3758) 4942,3720 4969.6,3692.4 U1.8 ; U2.16 5123,3975 v1(5141,3957)
  Bottom Layer w10: v1(4942,3758) v1(5141,3957)
NetU1_9: U1.9 U2.15 | length 814.4
  Top Layer w10: U1.9 5115.9,3723.9 5282,3890 5282,4072 5240,4114 5155,4114 5141,4100 5141,4046 5120,4025 U2.15
NetU1_10: U1.10 U2.14 | length 440.5
  Top Layer w10: U1.10 5030,3755.39 5040,3765.39 5040,3809.77 4982,3867.77 4982,4019 5038,4075 U2.14
NetU1_11: U1.11 U2.13 | length 470.6
  Top Layer w10: U1.11 4981,3786.89 4962,3805.89 4962,4093 4994,4125 U2.13
NetU1_12: U1.12 U2.12 | length 439.2
  Top Layer w10: U1.12 4937.48,4129.96 4960,4152.48 5029.18,4152.48 5051.7,4175 U2.12
NetU1_13: U1.13 U2.11 | length 509
  Top Layer w10: U1.13 4905.98,4159.98 4939.66,4193.66 5020,4193.66 5051.34,4225 U2.11
NetU2_3: U2.3 U2.5 | length 166.1
  Top Layer w10: U2.3 5420,3875 5408,3887 5408,3963 5420,3975 U2.5
NetU2_6: U2.6 U3.1 | length 118.5
  Top Layer w10: U2.6 5479,4025 5519,4065 U3.1
pads on no net: Display.S1 Display.S2 Display.S3 Display.S4 R2.P1 R2.P2 RESET.1 RESET.4 U1.1 U1.2 U1.3 U1.6 U1.17 U1.20 U1.21 U1.22 U1.23 U1.24 U1.25 U1.26 U1.27 U1.28 U1.39 U1.40 U1.41 U1.42 U1.43 U1.44 U2.9 U3.2 U3.3 U3.5 U3.6 U3.7

## Silkscreen, mask and mechanical layers (free items; w line width, h text height)
Mechanical 1:
  lines w47.24: 3385,1800 3385,4630 6680,4630 6680,1800 3385,1800

## Text inside footprints (layer, text, board x,y; h text height)
R2: Mechanical 1 "3549S-1AA-103A" at 54000,-16960 h60 r90